# EAGLE board Lockery - Cylinder (EAGLE 7.6.0)

Size 73.58 x 63.39 mm. Coordinates in mm from the lower left corner, seen from the top.
Outline: 0,0 56.82,0 56.82,53.33 0,53.33 0,0
Copper layers (1*16): Top 0.035mm / dielectric 1.5mm / Bottom 0.035mm
Design rules "default": minimum track width 10mil, minimum drill 24mil, track to track 8mil, track to pad 8mil, pad to pad 8mil, via to via 8mil, smd to smd 8mil, copper to edge 40mil, drill to drill 8mil, minimum pad ring 10mil, minimum via ring 8mil, stop-mask expansion 4mil, vias tented up to drill 0mil, thermal gap 10mil

## Footprints (pad centres in the part's own frame; a part is rotated, then mirrored left to right if it is on the bottom)
LED5MM = drill 0.813 octagon: A -1.27,0; K 1.27,0
PIEZO-22MM = drill 1 pad 2.54: P$1 -5,0; P$2 5,0
0207/10 = drill 0.813 octagon: 1 -5.08,0; 2 5.08,0
1X3P-2.54-2.54-11.6-3.0-BLACK-MALE = drill 0.889 pad 1.651 square: 1 0,2.54 | drill 0.889 pad 1.651: 2 0,0; 3 0,-2.54
M251 = drill 0.813 long: 1 -2.54,0; 2 0,0; 3 2.54,0
TL1105 = drill 1 pad 1.676: 1 -2.25,3.25; 2 2.25,3.25; 3 -2.25,-3.25; 4 2.25,-3.25
ARDUINO_UNO = drill 1.016 pad 1.88: 0 63.5,50.8; 1 60.96,50.8; 2 58.42,50.8; 3 55.88,50.8; 3.3V 35.56,2.54; 4 53.34,50.8; 5 50.8,50.8; 5V 38.1,2.54; 6 48.26,50.8; 7 45.72,50.8; 8 41.656,50.8; 9 39.116,50.8; 10 36.576,50.8; 11 34.036,50.8; 12 31.496,50.8; 13 28.956,50.8; A0 50.8,2.54; A1 53.34,2.54; A2 55.88,2.54; A3 58.42,2.54; A4 60.96,2.54; A5 63.5,2.54; AREF 23.876,50.8; GND 26.416,50.8; GND. 43.18,2.54; GND.. 40.64,2.54; I/OREF 30.48,2.54; N/C 27.94,2.54; RESET 33.02,2.54; SCL 18.796,50.8; SDA 21.336,50.8; VIN 45.72,2.54 | hole 3.2: 66.04,7.62; 66.04,35.56; 15.24,50.8; 13.97,2.54

## Placement (x,y rotation side)
DKEY PAIR LED  [LED5MM]  5,86.28 0 top  (outside the outline)
DRESET LED  [LED5MM]  5,73.58 0 top  (outside the outline)
DWIFI LED  [LED5MM]  5,60.88 0 top
PIEZOBEEPER  [PIEZO-22MM]  5,111.68 0 top  (outside the outline)
R14  1k‎Ω  [0207/10]  5,137.08 0 top  (outside the outline)
R15  1k‎Ω  [0207/10]  5,149.78 0 top  (outside the outline)
R16  1k‎Ω  [0207/10]  5,162.48 0 top  (outside the outline)
R17  100‎Ω  [0207/10]  5,124.38 0 top  (outside the outline)
R18  1k‎Ω  [0207/10]  5,175.18 0 top  (outside the outline)
R19  1k‎Ω  [0207/10]  5,187.88 0 top  (outside the outline)
R20  1k‎Ω  [0207/10]  5,200.58 0 top  (outside the outline)
SERVO3  [1X3P-2.54-2.54-11.6-3.0-BLACK-MALE]  5,98.98 0 top  (outside the outline)
SIS_KEY_AUTHENTICATED  [M251]  5,213.28 0 top  (outside the outline)
SKEY PAIR BUTTON  [TL1105]  5,48.18 0 top
SNFC_KEY_DETECTOR  [M251]  5,225.98 0 top  (outside the outline)
SRESET BUTTON  [TL1105]  5,35.48 0 top
SWIFI Button  [TL1105]  5,22.78 0 top
U1  [ARDUINO_UNO]  5,10.08 0 top

## Library data of the parts
DKEY PAIR LED DRESET LED DWIFI LED PIEZOBEEPER R14-R20 SERVO3 SIS_KEY_AUTHENTICATED SKEY PAIR BUTTON SNFC_KEY_DETECTOR SRESET BUTTON SWIFI Button U1 = AUTODESK_CIRCUITS_BREADBOARD

## Nets
N$1: R14.2 SWIFI Button.4 U1.13
N$2: R16.2 SKEY PAIR BUTTON.4 U1.11
N$3: SERVO3.3 U1.2
N$4: R15.2 SRESET BUTTON.4 U1.12
N$5: PIEZOBEEPER.P$1 R17.2
N$6: PIEZOBEEPER.P$2 U1.3
N$7: R18.1 U1.10
N$8: R20.1 U1.8
N$9: DWIFI LED.A R18.2
N$10: R19.1 U1.9
N$11: DRESET LED.A R19.2
N$12: DKEY PAIR LED.A R20.2
N$13: SIS_KEY_AUTHENTICATED.2 U1.4
N$14: DKEY PAIR LED.K DRESET LED.K DWIFI LED.K R14.1 R15.1 R16.1 R17.1 SERVO3.1 SIS_KEY_AUTHENTICATED.1 SNFC_KEY_DETECTOR.1 U1.GND
N$15: SERVO3.2 SIS_KEY_AUTHENTICATED.3 SKEY PAIR BUTTON.3 SNFC_KEY_DETECTOR.3 SRESET BUTTON.3 SWIFI Button.3 U1.5V
N$16: SWIFI Button.2
N$17: SWIFI Button.1
N$18: SNFC_KEY_DETECTOR.2 U1.5
N$19: SKEY PAIR BUTTON.2
N$20: SKEY PAIR BUTTON.1
N$21: SRESET BUTTON.2
N$22: SRESET BUTTON.1

## Tracks (layer width: path | path; a pad name or v marks a point on that pad's centre or on a via)
N$1  (2 unrouted)
N$2  (2 unrouted)
N$3  (1 unrouted)
N$4  (2 unrouted)
N$5  (1 unrouted)
N$6  (1 unrouted)
N$7  (1 unrouted)
N$8  (1 unrouted)
N$9  (1 unrouted)
N$10  (1 unrouted)
N$11  (1 unrouted)
N$12  (1 unrouted)
N$13  (1 unrouted)
N$14  (10 unrouted)
N$15  (6 unrouted)
N$18  (1 unrouted)